# EAGLE board v002 (EAGLE 6.4)
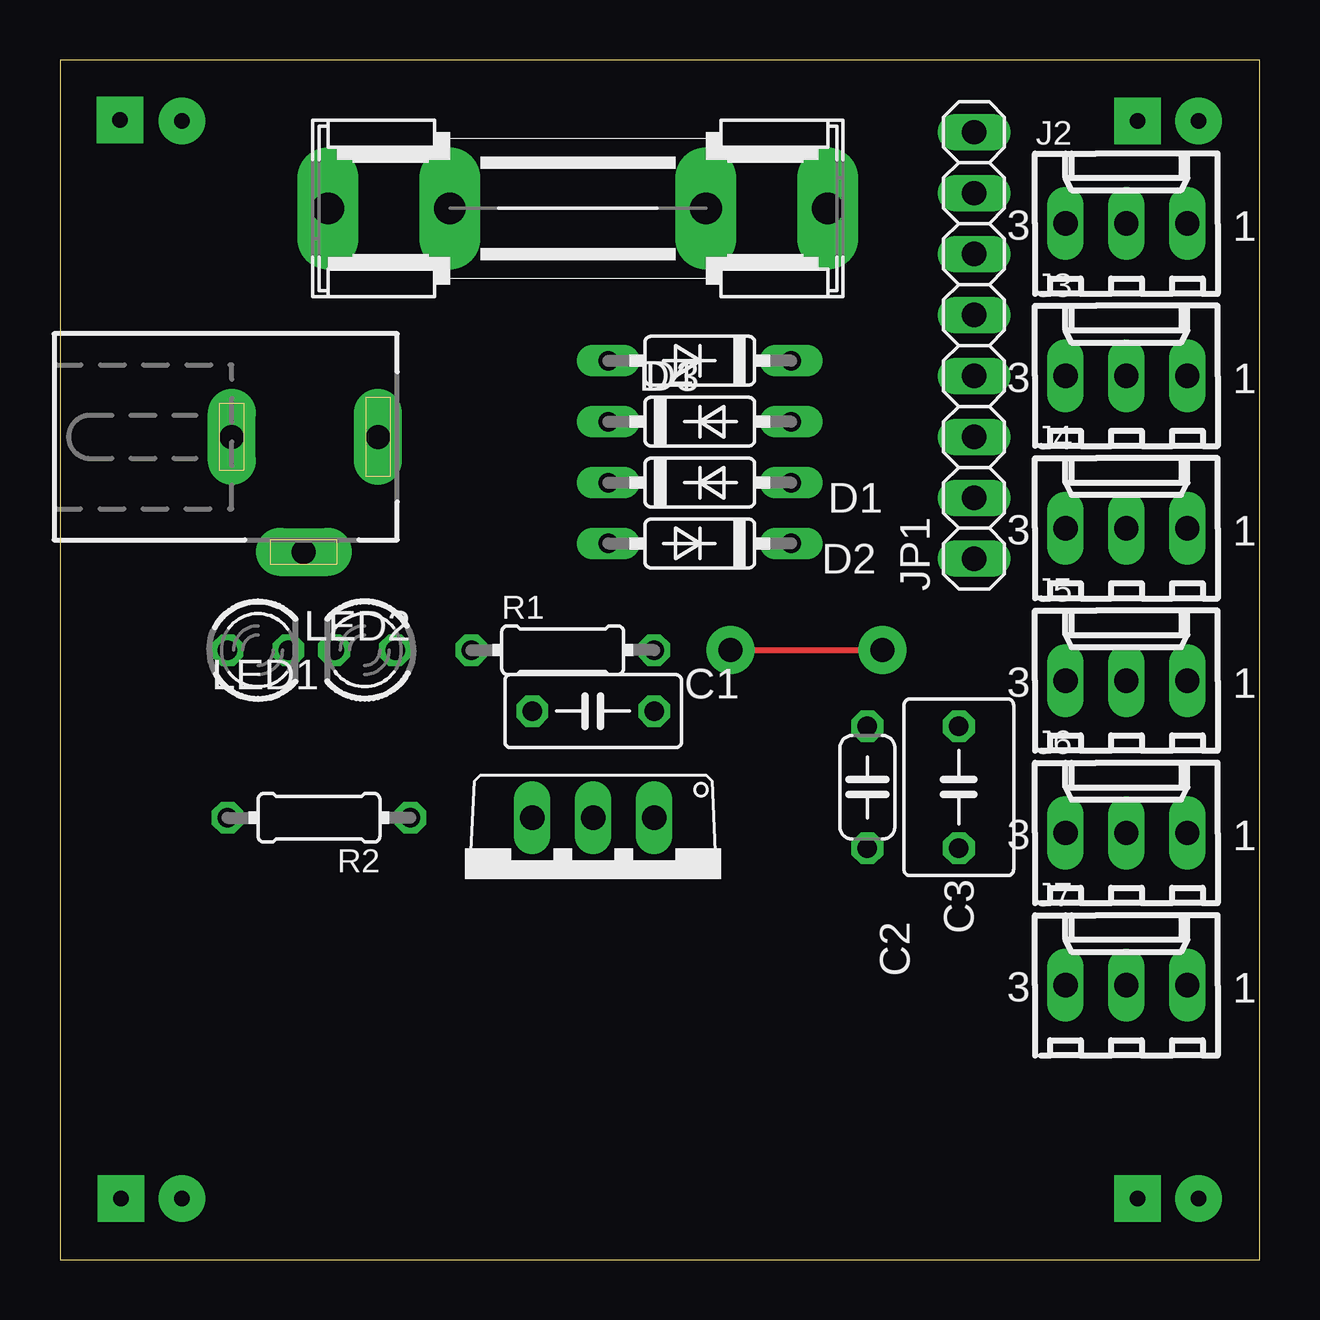
[diagram p0: board, top side]
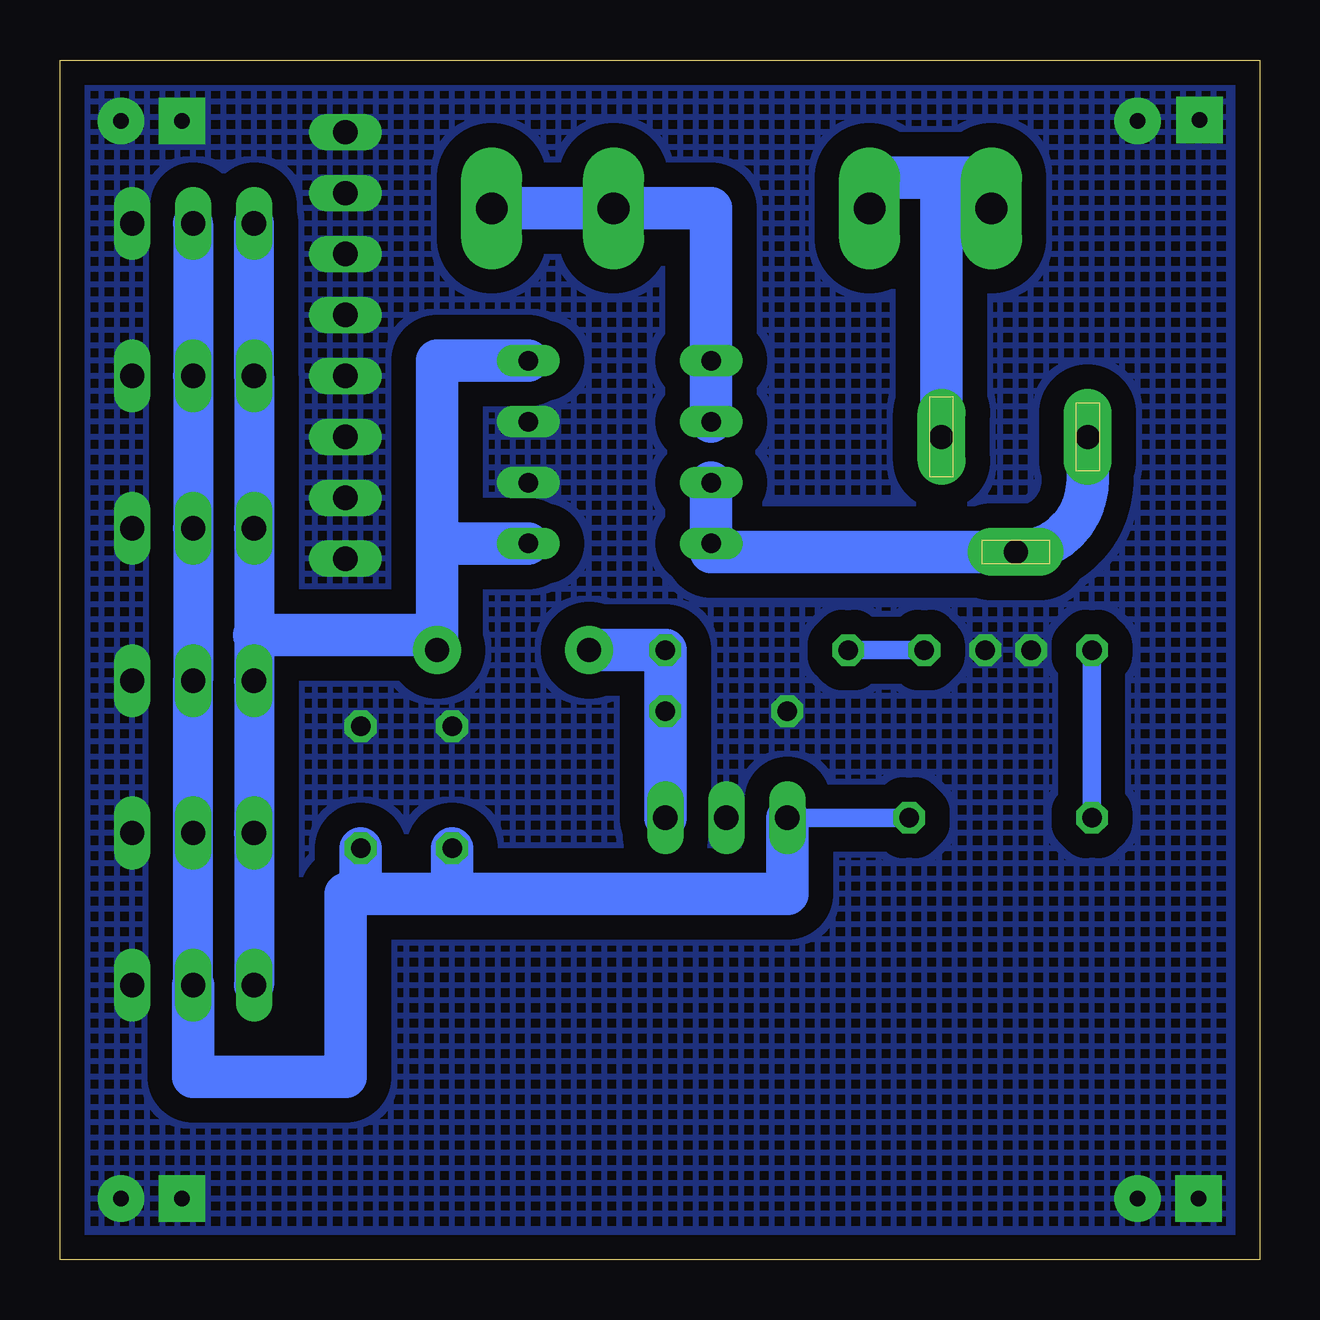
[diagram p1: board, bottom side, seen from below]

Size 50 x 50 mm. Coordinates in mm from the lower left corner, seen from the top.
Outline: 0,0 50,0 50,50 0,50 0,0
Copper layers (1*16): Top 0.035mm / dielectric 1.5mm / Bottom 0.035mm
Design rules "default": minimum track width 10mil, minimum drill 24mil, track to track 8mil, track to pad 8mil, pad to pad 8mil, via to via 8mil, smd to smd 8mil, copper to edge 40mil, drill to drill 8mil, minimum pad ring 10mil, minimum via ring 8mil, stop-mask expansion 4mil, vias tented up to drill 0mil, thermal gap 10mil

## Footprints (pad centres in the part's own frame; a part is rotated, then mirrored left to right if it is on the bottom)
C050-030X075 = drill 0.813 octagon: 1 -2.54,0; 2 2.54,0
C050-024X044 = drill 0.813 octagon: 1 -2.54,0; 2 2.54,0
C050-045X075 = drill 0.813 octagon: 1 -2.54,0; 2 2.54,0
DO35-7 = drill 0.813 long: A 3.81,0; C -3.81,0
SHK20L = drill 1.321 pad 2.54 long: 1A -10.414,0; 1B -5.334,0; 2A 10.414,0; 2B 5.334,0
TO220V = drill 1.016 long: 1 -2.54,-2.54; 2 0,-2.54; 3 2.54,-2.54
DCJ0202 = drill 1 pad 2 long: 1 0,3.1; 2 4.8,0; 3 0,-3
6410-03 = drill 1.016 long: 1 2.54,0; 2 0,0; 3 -2.54,0
1X08 = drill 1.016 long: 1 -8.89,0; 2 -6.35,0; 3 -3.81,0; 4 -1.27,0; 5 1.27,0; 6 3.81,0; 7 6.35,0; 8 8.89,0
LED3MM = drill 0.813 octagon: A -1.27,0; K 1.27,0
ZZZ_MODULE_05X05 = drill 0.64 pad 1.93 square: GND@1 2.5,47.5; GND@2 44.92,47.46; GND@7 2.54,2.54; GND@8 44.92,2.54 | drill 0.64 pad 1.93: GND@3 47.46,47.46; GND@4 5.08,47.46; GND@5 47.46,2.54; GND@6 5.08,2.54
0204/7 = drill 0.813 octagon: 1 -3.81,0; 2 3.81,0

## Placement (x,y rotation side)
C1  0.33uF  [C050-030X075]  22.23,22.86 180 top
C2  0.1uF  [C050-024X044]  33.66,19.68 90 top
C3  1uF  [C050-045X075]  37.47,19.68 90 top
D1  1N4004  [DO35-7]  26.67,32.38 0 top
D2  1N4004  [DO35-7]  26.67,29.84 180 top
D3  1N4004  [DO35-7]  26.67,34.92 0 top
D4  1N4004  [DO35-7]  26.67,37.47 180 top
F1  3A  [SHK20L]  21.59,43.81 0 top
IC1  7805TV  [TO220V]  22.23,15.88 180 top
J1  12VDC  [DCJ0202]  10.16,34.29 270 top
J2  Out-1  [6410-03]  44.45,43.18 0 top
J3  Out-2  [6410-03]  44.45,36.83 0 top
J4  Out-3  [6410-03]  44.45,30.48 0 top
J5  Out-4  [6410-03]  44.45,24.13 0 top
J6  Out-5  [6410-03]  44.45,17.78 0 top
J7  Out-6  [6410-03]  44.45,11.43 0 top
JP1  GND  [1X08]  38.1,38.1 90 top
LED1  GREEN  [LED3MM]  12.7,25.4 180 top
LED2  GREEN  [LED3MM]  8.26,25.4 0 top
PCB1  ZZZ_MODULE05X05  [ZZZ_MODULE_05X05]  0,0 0 top
R1  470R  [0204/7]  20.95,25.4 0 top
R2  470R  [0204/7]  10.79,18.41 180 top

## Library data of the parts
C1-C3 R1 R2 = rcl
D1-D4 = diode
F1 = fuse; OC_FARNELL: unknown; OC_NEWARK: unknown
IC1 = linear
J1 = con-jack; OC_FARNELL: unknown; OC_NEWARK: unknown
J2-J7 = con-molex; OC_FARNELL: unknown; OC_NEWARK: unknown
JP1 = pinhead
LED1 LED2 = led
PCB1 = GNLib

## Nets
+5V: C2.1 C3.1 IC1.3 J2.2 J3.2 J4.2 J5.2 J6.2 J7.2 R2.1
+12V: C1.1 D2.C D4.C IC1.1 J2.3 J3.3 J4.3 J5.3 J6.3 J7.3 R1.2
GND: C1.2 C2.2 C3.2 D1.A D3.A IC1.2 J2.1 J3.1 J4.1 J5.1 J6.1 J7.1 JP1.1 JP1.2 JP1.3 JP1.4 JP1.5 JP1.6 JP1.7 JP1.8 LED1.K LED2.K PCB1.GND@1 PCB1.GND@2 PCB1.GND@3 PCB1.GND@4 PCB1.GND@5 PCB1.GND@6 PCB1.GND@7 PCB1.GND@8
N$1: LED1.A R1.1
N$3: LED2.A R2.2
N$4: F1.1A J1.1
N$7: D1.C D2.A J1.2 J1.3
N$8: D3.C D4.A F1.2A

## Tracks (layer width: path | path; a pad name or v marks a point on that pad's centre or on a via)
+5V
  Bottom 0.762: IC1.3 R2.1
  Bottom 1.676: J2.2 J3.2 J4.2 J5.2 J6.2 J7.2
  Bottom 1.778: J7.2 44.45,7.62 38.1,7.62 38.1,15.24 37.47,15.24 | IC1.3 19.68,15.24 33.66,15.24 | 33.66,15.24 37.47,15.24 | C3.1 37.47,15.24 | C2.1 33.66,15.24
+12V  (via drill 1 pad 2)
  Top 0.254: v27.94,25.4 v34.29,25.4
  Bottom 1.676: J2.3 J3.3 J4.3 41.91,26.04 J5.3 J6.3 J7.3
  Bottom 1.778: 34.29,29.84 D2.C | IC1.1 C1.1 R1.2 v27.94,25.4 | D4.C 34.29,37.47 34.29,29.84 | v34.29,25.4 34.29,26.04 | 34.29,29.84 34.29,26.04 | 34.29,26.04 41.91,26.04
GND
  pour Bottom (isolate 1.016, no thermals, hatched): 0,0 0,50 50,50 50,0
N$1
  Bottom 0.762: R1.1 LED1.A
N$3
  Bottom 0.762: R2.2 LED2.A
N$4
  Bottom 1.778: J1.1 13.26,45.09 | 13.26,45.09 11.43,45.09 F1.1A | 13.26,45.09 16.51,45.09
N$7
  Bottom 1.778: J1.3 7.16,32.49 arc90 J1.2 22.86,29.49 D2.A D1.C
N$8
  Bottom 1.778: D3.C D4.A 22.86,43.81 F1.2A